# EAGLE board 3- Contador em Arduino Display e Neopixel (EAGLE 9.7.0)

Size 133.64 x 89.84 mm. Coordinates in mm from the lower left corner, seen from the top.
Outline: 0,0 133.63,0 133.63,89.84 0,89.84 0,0
Copper layers (1*16): Top 0.035mm / dielectric 1.5mm / Bottom 0.035mm
Design rules "default": minimum track width 6mil, minimum drill 0.35mm, track to track 6mil, track to pad 6mil, pad to pad 6mil, via to via 6mil, smd to smd 6mil, copper to edge 40mil, drill to drill 6mil, minimum pad ring 10mil, minimum via ring 8mil, stop-mask expansion 4mil, vias tented up to drill 0mil, thermal gap 10mil

## Footprints (pad centres in the part's own frame; a part is rotated, then mirrored left to right if it is on the bottom)
7SEG-13 = drill 0.813 long: 1 -5.08,-7.62; 2 -2.54,-7.62; 3 0,-7.62; 4 2.54,-7.62; 5 5.08,-7.62; 6 5.08,7.62; 7 2.54,7.62; 8 0,7.62; 9 -2.54,7.62; 10 -5.08,7.62
WS2812-STRIP = drill 1.016 long: 1 -3.81,0; 2 -1.27,0; 3 1.27,0; 4 3.81,0
RESAD1016W63L850D250B = drill 0.83 pad 1.43: 1 -5.08,0; 2 5.08,0
SWITCH-MOMENTARY-PTH-6.5MM = drill 1.016 pad 1.88: 1 -3.251,2.261; 2 3.251,2.261; 3 -3.251,-2.261; 4 3.251,-2.261
ARDUINO-UNO-R3-SHIELD = drill 1.016 pad 1.88: 3.3V 24.13,-2.54; 5V 24.13,0; A0 24.13,12.7; A1 24.13,15.24; A2 24.13,17.78; A3 24.13,20.32; A4 24.13,22.86; A5 24.13,25.4; AREF -24.13,-13.97; D2 -24.13,20.32; D3 -24.13,17.78; D4 -24.13,15.24; D5 -24.13,12.7; D6 -24.13,10.16; D7 -24.13,7.62; D8 -24.13,3.81; D9 -24.13,1.27; D10 -24.13,-1.27; D11 -24.13,-3.81; D12 -24.13,-6.35; D13 -24.13,-8.89; GND@0 24.13,2.54; GND@1 24.13,5.08; GND@2 -24.13,-11.43; IOREF 24.13,-7.62; NC 24.13,-10.16; RES 24.13,-5.08; RX -24.13,25.4; SCL -24.13,-19.05; SDA -24.13,-16.51; TX -24.13,22.86; VIN 24.13,7.62

## Placement (x,y rotation side)
DIGIT1  7SEG-CK  [7SEG-13]  124.36,60.77 0 top
LED1  WS2812B_STRIP  [WS2812-STRIP]  11.9,7.75 270 top
R1  390  [RESAD1016W63L850D250B]  124.36,42.99 90 top
R2  390  [RESAD1016W63L850D250B]  124.36,78.55 90 top
R3  10k  [RESAD1016W63L850D250B]  98.96,42.99 90 top
S1  SWITCH_MOMENTARY  [SWITCH-MOMENTARY-PTH-6.5MM]  101.5,62.04 90 top
U7  ARDUINO-UNO-R3-SHIELD  [ARDUINO-UNO-R3-SHIELD]  47.88,59.99 270 top

## Library data of the parts
DIGIT1 = Tinkercad; CATEGORY: Opto-Electronic; SUB-CATEGORY: Display; TYPE: 7-Segment
LED1 R1-R3 S1 U7 = Tinkercad

## Nets
DIGIT1_CK1: DIGIT1.3 R1.2
DIGIT1_CK2: DIGIT1.8 R2.1
U7_5V: LED1.2 S1.3 S1.4 U7.5V
U7_D2: DIGIT1.7 U7.D2
U7_D3: DIGIT1.6 U7.D3
U7_D4: DIGIT1.4 U7.D4
U7_D5: DIGIT1.2 U7.D5
U7_D6: DIGIT1.1 U7.D6
U7_D7: DIGIT1.9 U7.D7
U7_D8: DIGIT1.10 U7.D8
U7_D9: R3.2 S1.1 S1.2 U7.D9
U7_D10: LED1.1 U7.D10
U7_GND: LED1.3 R1.1 R2.2 R3.1 U7.GND@0 U7.GND@1 U7.GND@2

## Tracks (layer width: path | path; a pad name or v marks a point on that pad's centre or on a via)
DIGIT1_CK1  (1 unrouted)
DIGIT1_CK2  (1 unrouted)
U7_5V  (3 unrouted)
U7_D2  (1 unrouted)
U7_D3  (1 unrouted)
U7_D4  (1 unrouted)
U7_D5  (1 unrouted)
U7_D6  (1 unrouted)
U7_D7  (1 unrouted)
U7_D8  (1 unrouted)
U7_D9  (3 unrouted)
U7_D10  (1 unrouted)
U7_GND  (6 unrouted)